# EAGLE board pot_board (EAGLE 7.6.0)

Size 100 x 80 mm. Coordinates in mm from the lower left corner, seen from the top.
Outline: 0,0 100,0 100,80 0,80 0,0
Copper layers (1*16): Top 0.035mm / dielectric 1.5mm / Bottom 0.035mm
Design rules "default *": minimum track width 32mil, minimum drill 31mil, track to track 18mil, track to pad 18mil, pad to pad 18mil, via to via 18mil, smd to smd 8mil, copper to edge 0mil, drill to drill 18mil, minimum pad ring 10mil, minimum via ring 8mil, stop-mask expansion 4mil, vias tented up to drill 0mil, thermal gap 10mil

## Footprints (pad centres in the part's own frame; a part is rotated, then mirrored left to right if it is on the bottom)
DIL24-6 = drill 0.813 long: 1 -13.97,-7.62; 2 -11.43,-7.62; 3 -8.89,-7.62; 4 -6.35,-7.62; 5 -3.81,-7.62; 6 -1.27,-7.62; 7 1.27,-7.62; 8 3.81,-7.62; 9 6.35,-7.62; 10 8.89,-7.62; 11 11.43,-7.62; 12 13.97,-7.62; 13 13.97,7.62; 14 11.43,7.62; 15 8.89,7.62; 16 6.35,7.62; 17 3.81,7.62; 18 1.27,7.62; 19 -1.27,7.62; 20 -3.81,7.62; 21 -6.35,7.62; 22 -8.89,7.62; 23 -11.43,7.62; 24 -13.97,7.62
ST15 = drill 1.2 long: A 2.025,0.505; E 1.99,44.4; S -1.99,0.5
EVUF = drill 1.1 pad 1.676: 1 -2.5,-7; 2 0,-7; 3 2.5,-7 | drill 1.6 pad 2.8 square: M1 4.5,0; M2 -4.5,0
22-23-2081 = drill 1 long: 1 -8.89,0; 2 -6.35,0; 3 -3.81,0; 4 -1.27,0; 5 1.27,0; 6 3.81,0; 7 6.35,0; 8 8.89,0

## Placement (x,y rotation side)
IC1  4067N  [DIL24-6]  73.66,55.88 0 top
R1  [ST15]  53.34,36.83 270 top
R2  [ST15]  53.34,26.67 270 top
R3  [ST15]  53.34,16.51 270 top
R4  [ST15]  53.34,6.35 270 top
R5  [ST15]  46.99,36.83 90 top
R6  [ST15]  46.99,26.67 90 top
R7  [ST15]  46.99,16.51 90 top
R8  [ST15]  46.99,6.35 90 top
R9  EVUF2A  [EVUF]  10.16,69.85 180 top
R10  EVUF2A  [EVUF]  10.16,58.42 0 top
R11  EVUF2A  [EVUF]  22.86,69.85 180 top
R12  EVUF2A  [EVUF]  22.86,58.42 0 top
R13  EVUF2A  [EVUF]  35.56,69.85 180 top
R14  EVUF2A  [EVUF]  48.26,69.85 180 top
R15  EVUF2A  [EVUF]  48.26,58.42 0 top
R16  EVUF2A  [EVUF]  35.56,58.42 0 top
X2  22-23-2081  [22-23-2081]  96.52,59.69 270 top

## Library data of the parts
IC1 = 40xx
R1-R16 = pot
X2 = con-molex; MF: MOLEX; MPN: 22-23-2081; OC_FARNELL: 1756826; OC_NEWARK: 01C7592

## Nets
+5V: IC1.24 R1.E R2.E R3.E R4.E R5.E R6.E R7.E R8.E R9.3 R10.3 R11.3 R12.3 R13.3 R14.3 R15.3 R16.3 X2.1
GND: IC1.12 R1.A R2.A R3.A R4.A R5.A R6.A R7.A R8.A R9.1 R10.1 R11.1 R12.1 R13.1 R14.1 R15.1 R16.1 X2.8
N$1: IC1.9 R1.S
N$2: IC1.8 R2.S
N$3: IC1.7 R3.S
N$4: IC1.6 R4.S
N$5: IC1.5 R8.S
N$6: IC1.4 R7.S
N$7: IC1.3 R6.S
N$8: IC1.2 R5.S
N$11: IC1.23 R9.2
N$12: IC1.10 X2.7
N$13: IC1.11 X2.6
N$14: IC1.14 X2.5
N$15: IC1.13 X2.4
N$16: X2.3
N$17: IC1.1 X2.2
N$18: IC1.22 R10.2
N$19: IC1.21 R11.2
N$20: IC1.20 R12.2
N$21: IC1.19 R13.2
N$22: IC1.18 R16.2
N$23: IC1.17 R15.2
N$24: IC1.16 R14.2

## Tracks (layer width: path | path; a pad name or v marks a point on that pad's centre or on a via)
+5V  (17 unrouted)
GND  (17 unrouted)
N$1  (1 unrouted)
N$2  (1 unrouted)
N$3  (1 unrouted)
N$4  (1 unrouted)
N$5  (1 unrouted)
N$6  (1 unrouted)
N$7  (1 unrouted)
N$8  (1 unrouted)
N$11  (1 unrouted)
N$12  (1 unrouted)
N$13  (1 unrouted)
N$14  (1 unrouted)
N$15  (1 unrouted)
N$17  (1 unrouted)
N$18  (1 unrouted)
N$19  (1 unrouted)
N$20  (1 unrouted)
N$21  (1 unrouted)
N$22  (1 unrouted)
N$23  (1 unrouted)
N$24  (1 unrouted)